# Altium PCB IKIC_PCB.PcbDoc
Units mm, origin at the board's own origin, x right, y up, seen from the top; angles counter-clockwise.
Board outline 145.16 x 127 mm, 2 copper layers (Top Layer, Bottom Layer); 51 components, 37 nets, 180 pads, 30 vias.
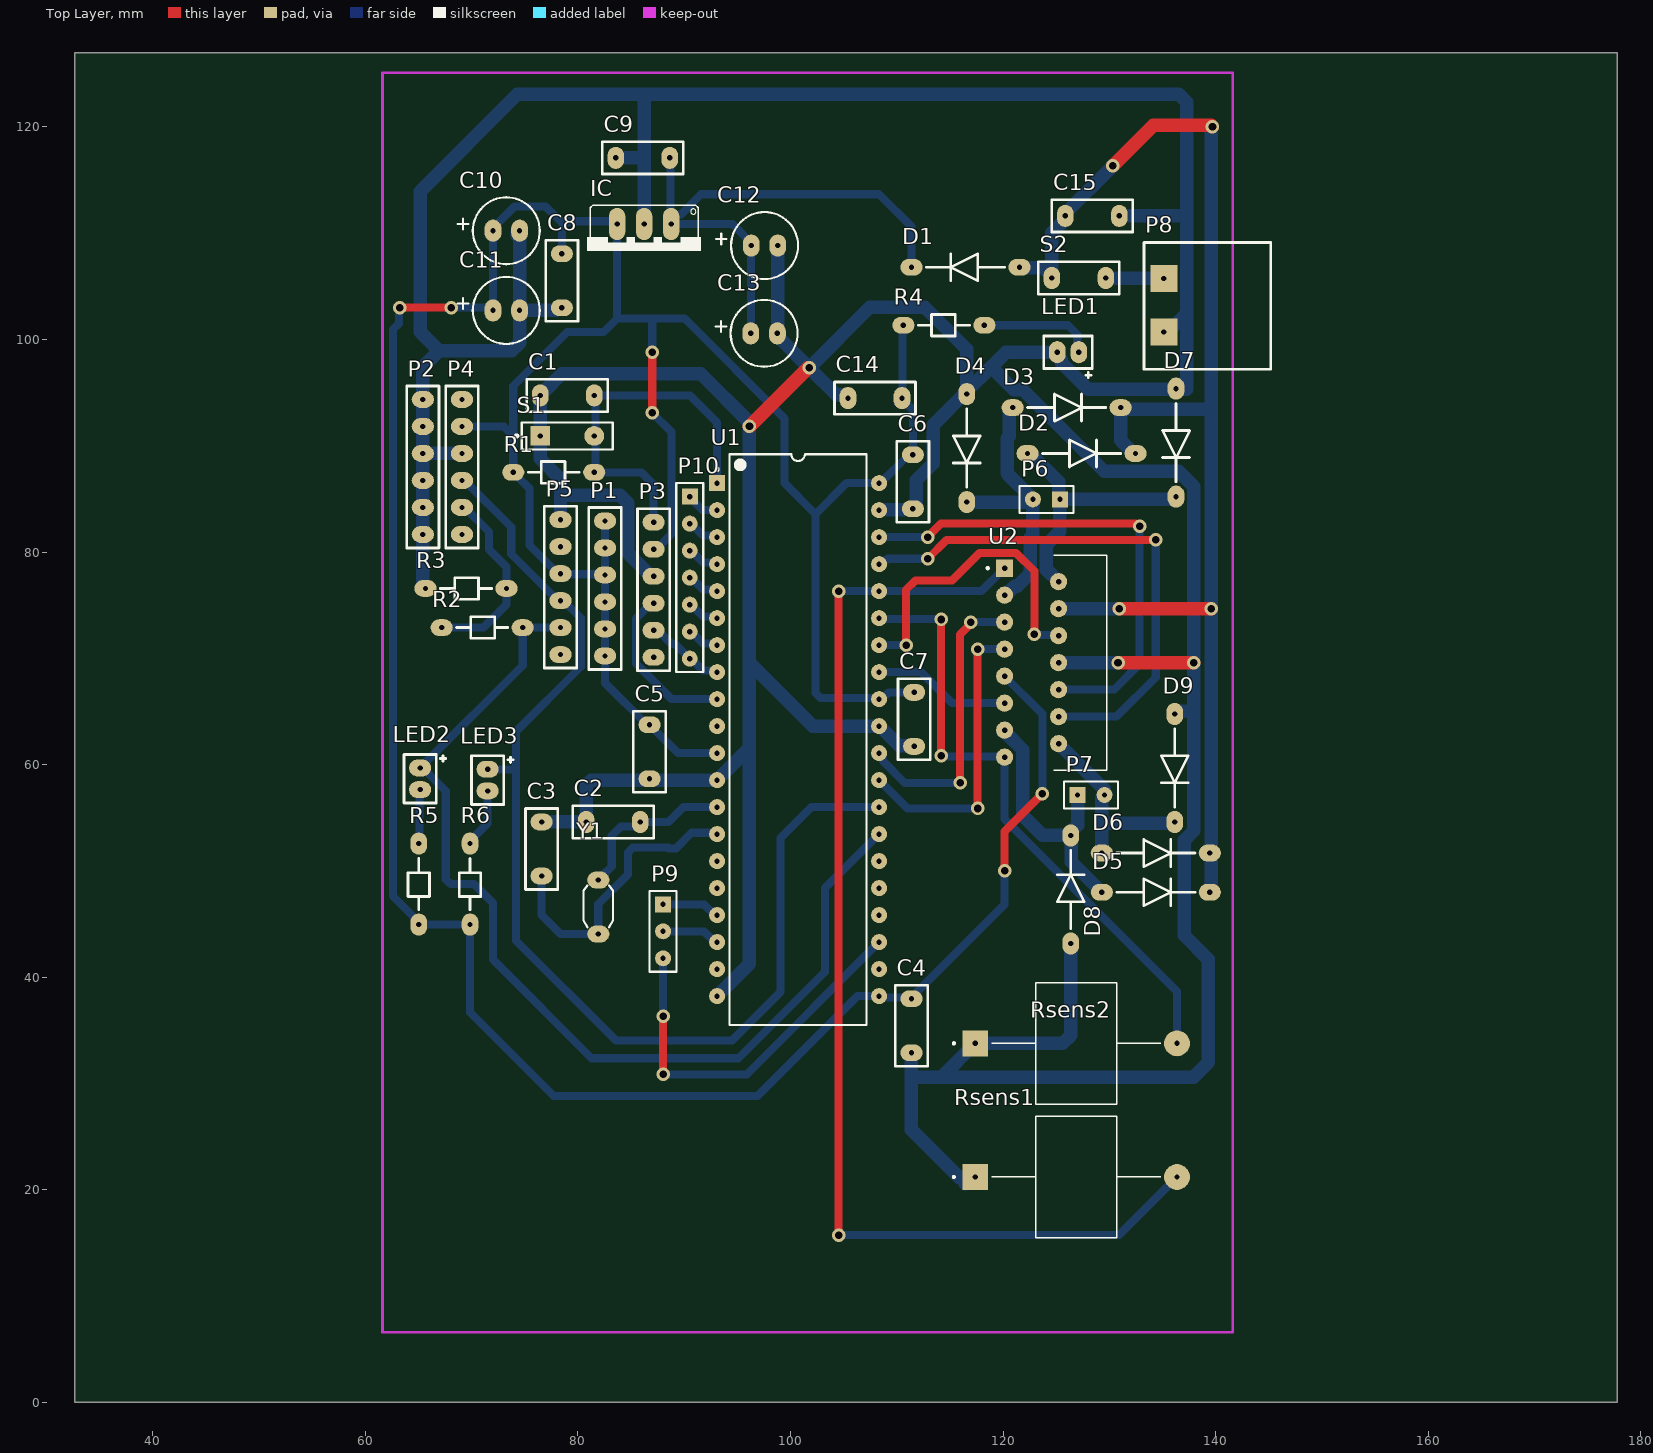
[diagram p0: Top Layer view]
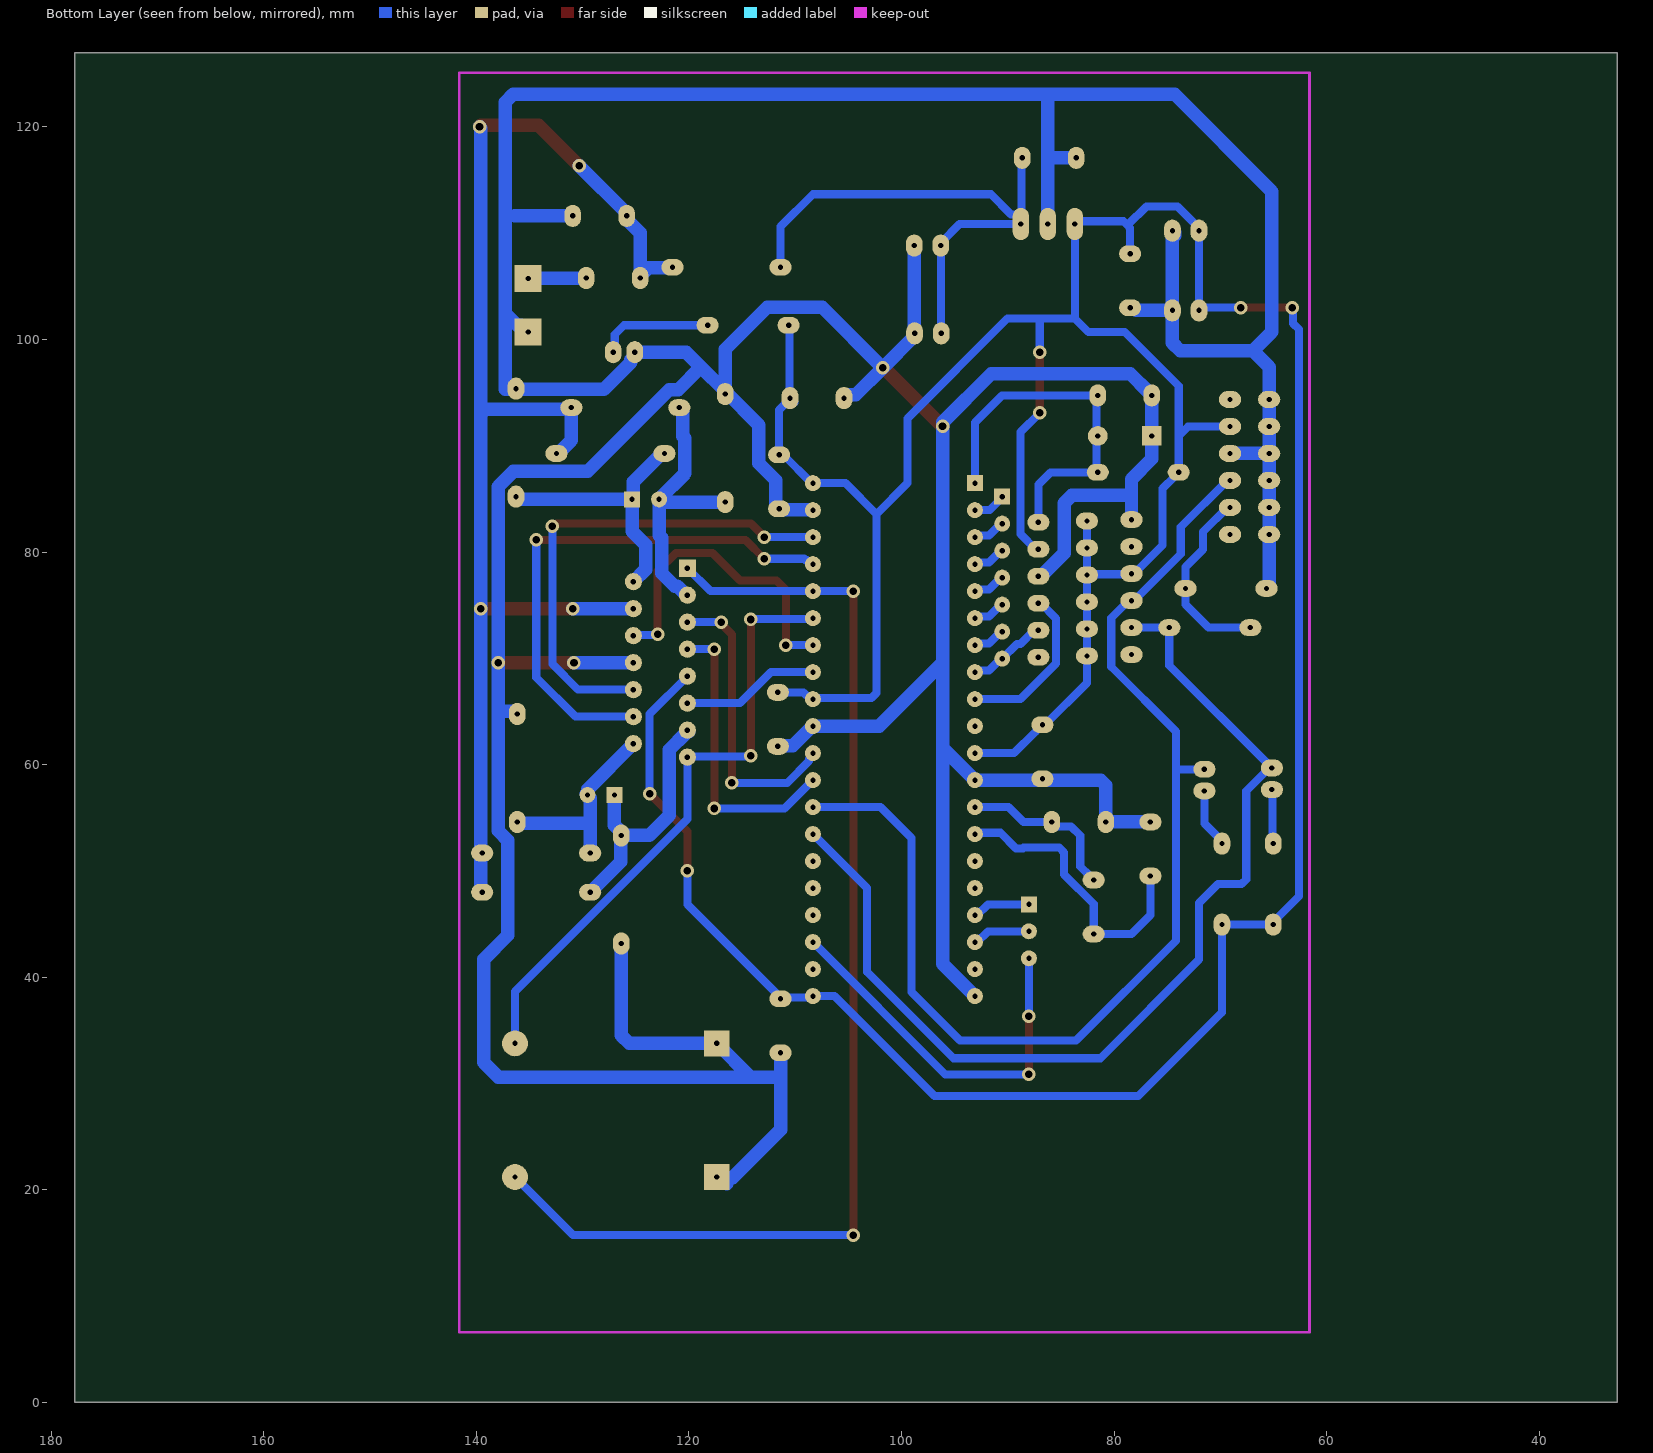
[diagram p1: Bottom Layer view, seen from below]

## Layer stack, top to bottom
Top Solder: solder mask 0.0102, Solder Resist, Dk 3.5
Top Layer: signal copper 0.0356
Dielectric 1: dielectric 0.32, FR-4, Dk 4.8
Bottom Layer: signal copper 0.0356
Bottom Solder: solder mask 0.0102, Solder Resist, Dk 3.5

## Board outline
32.639,0 177.8,0 177.8,127 32.639,127

## Design rules (kind name [scope] priority, off if disabled: settings)
Clearance [All] p1: gap=0.254 ignorepadtopadclearanceinfootprint=FALSE except(0: Arc-Hole Track-Hole SMDPad-Hole THPad-Hole Via-Hole Fill-Hole Poly-Hole Region-Hole Text-Hole)
PolygonConnect [All] p1: connectstyle=Relief reliefconductorwidth=0.254 reliefentries=4 polygonreliefangle="90 Angle" airgapwidth=0.254
RoutingVias [All] p1: holewidth=0.711 width=1.27 viastyle="Through Hole" minholewidth=0.711 minwidth=1.27 maxholewidth=0.711 maxwidth=1.27
SolderMaskExpansion [All] p1: expansion=0.102 istentingtop=FALSE
Width Width_2 [InNetClass('Signal Class')] p1: maxlimit=1 minlimit=0.254 preferedwidth=0.762 minimp=50.000000 maximp=50.000000 favimp=50.000000
Width Width_1 [InNetClass('Power Class')] p2: maxlimit=1.3 minlimit=0.254 preferedwidth=1.27 minimp=50.000000 maximp=50.000000 favimp=50.000000
Width [InNetClass('Signal Class')] p3: maxlimit=1.524 minlimit=0.127 preferedwidth=0.762 minimp=50.000000 maximp=50.000000 favimp=50.000000
30 further rules are at their usual default settings.

## Classes and differential pairs
net class "Signal Class": +5 INT0 INT1 INT2 MCLR NetC9_2 NetLED1_1 NetLED2_1 NetLED3_1 NetP4_5 OSC1 OSC2 PGC PGD PWM1 PWM2 RB0 RB1 RB2 RB3 RB4 RB5 RB9 RB10 RB11 RB12 RF0 RF1 U2RX U2TX
net class "Power Class": GND NetP8_2 OUT1 OUT2 OUT3 OUT4 VCC

## Components (designator, comment, footprint, x,y, rotation, side; value= is the part's Value field where it differs from the comment)
C1 "Cap" CAP200 76.454,94.742 r0 top value=100nF
C2 "Cap" CAP200 80.772,54.61 r0 top value=22pF
C3 "Cap" CAP200 76.581,54.61 r270 top value=22pF
C4 "Cap" CAP200 111.379,32.893 r90 top value=100nF
C5 "Cap" CAP200 86.741,58.674 r90 top value=100nF
C6 "Cap" CAP200 111.506,84.074 r90 top value=100nF
C7 "Cap" CAP200 111.633,61.722 r90 top value=100nF
C8 "Cap" CAP200 78.486,102.997 r90 top value=100nF
C9 "Cap" CAP200 83.566,117.094 r0 top value=100nF
C10 "Cap Pol1" RAD4 72.009,110.236 r0 top value=470uF
C11 "Cap Pol1" RAD4 72.009,102.743 r0 top value=470uF
C12 "Cap Pol1" RAD4 96.306,108.839 r0 top value=470uF
C13 "Cap Pol1" RAD4 96.266,100.584 r0 top value=470uF
C14 "Cap" CAP200 105.41,94.488 r0 top value=100nF
C15 "Cap" CAP200 130.937,111.633 r180 top value=100nF
D1 "Diode 1N4007" DIODE400 116.713,106.807 r0 top
D2 "Diode 1N5402" DIODE400 127.127,89.281 r180 top
D3 "Diode 1N5402" DIODE400 125.73,93.599 r180 top
D4 "Diode 1N5402" DIODE400 116.586,90.043 r90 top
D5 "Diode 1N5402" DIODE400 134.112,48.006 r180 top
D6 "Diode 1N5402" DIODE400 134.112,51.689 r180 top
D7 "Diode 1N5402" DIODE400 136.271,90.551 r90 top
D8 "Diode 1N5402" DIODE400 126.365,48.006 r270 top
D9 "Diode 1N5402" DIODE400 136.144,59.944 r90 top
IC "L7805" 78XXS 86.233,108.331 r180 top
LED1 "GREEN" LED_2 126.111,98.425 r180 top
LED2 "GREEN" LED_2 65.532,58.674 r270 top
LED3 "GREEN" LED_2 71.882,58.547 r270 top
P1 "5V" HEADER_6 82.55,76.581 r180 top
P2 "GND" HEADER_6 65.405,88.011 r0 top
P3 "Programator" HEADER_6 87.122,76.454 r0 top
P4 "Bluetooth" HEADER_6 69.088,88.011 r0 top
P5 "FT232" HEADER_6 78.359,76.708 r180 top
P6 "Motor 1" HDR1X2 125.349,84.963 r180 top
P7 "Motor 2" HDR1X2 127,57.15 r0 top
P8 "2EDGRC-5.08-02P-14-00A(H)" PWR_Con 139.192,103.632 r0 top
P9 "Interrupt" HDR1X3 88.011,46.863 r270 top
P10 "GPIO" HDR1X7 90.524,85.217 r270 top
R1 "Res1" RES400 77.724,87.503 r180 top value=10K
R2 "Res1" RES400 70.993,72.898 r0 top value=4.7K
R3 "Res1" RES400 69.469,76.581 r0 top value=10K
R4 "Res1" RES400 114.427,101.346 r180 top value=1K
R5 "Res1" RES400 65.024,48.768 r270 top value=1K
R6 "Res1" RES400 69.85,48.768 r270 top value=1K
Rsens1 "15W" DIOAD1898W129L762D1143 126.873,21.209 r0 top value=5
Rsens2 "15W" DIOAD1898W129L762D1143 126.873,33.782 r0 top value=5
S1 "SW-PB" SPST-2 78.994,90.932 r0 top
S2 "SW-SPST" CAP200 129.667,105.791 r180 top
U1 "DSPIC30F4013-20I/P" PDIP600-P40 100.711,62.357 r0 top
U2 "L298N" TO127P2020X500X2100-15 120.142,78.486 r0 top
Y1 "XTAL" OSC_5 81.915,46.99 r0 top

## Footprints (in the part's own frame and the unit in brackets; to place one, negate y for a bottom-side part, rotate by r counter-clockwise, add the part's x,y. Pads: shape width x height; smd on the part's side, far side on the other; paste and mask are expansions set on the pad)
78XXS [mil]
  oval 60x120 hole 19.68: GND(0,-100) IN(-100,-100) OUT(100,-100)
  silkscreen extent -210,-170 210,0
CAP200 [mil]
  oval 62x82 hole 19.68: 1(0,0) 2(200,0)
  silkscreen extent -50,-60 250,60
DIOAD1898W129L762D1143 [mm]
  round 2.43 hole 0.5: A(9.49,0)
  rect 2.43x2.43 / inner round 2.43 / far side rect 2.43x2.43 hole 0.5: C(-9.49,0)
  silkscreen extent -11.6,-5.72 7.96,5.72
DIODE400 [mil]
  oval 82x62 hole 19.68: 1(190,0) 2(-210,0)
  silkscreen extent -155,-50 135,50
HDR1X2 [mm] "Connector; Header; 2 Position"
  rect 1.5x1.5 hole 0.5: 1(0,0)
  round 1.5 hole 0.5: 2(2.54,0)
  silkscreen extent -1.27,-1.27 3.81,1.27
HDR1X3 [mm] "Connector; Header; 3 Position"
  rect 1.5x1.5 hole 0.5: 1(0,0)
  round 1.5 hole 0.5: 2(2.54,0) 3(5.08,0)
  silkscreen extent -1.27,-1.27 6.35,1.27
HDR1X7 [mm] "Connector; Header; 7 Position"
  rect 1.5x1.5 hole 0.5: 1(0,0)
  round 1.5 hole 0.5: 2(2.54,0) 3(5.08,0) 4(7.62,0) 5(10.16,0) 6(12.7,0) 7(15.24,0)
  silkscreen extent -1.27,-1.27 16.51,1.27
HEADER_6 [mil]
  oval 82x62 hole 19.68: 1(0,250) 2(0,150) 3(0,50) 4(0,-50) 5(0,-150) 6(0,-250)
  silkscreen extent -60,-300 60,300
LED_2 [mil]
  oval 62x82 hole 19.68: 1(40,-15) 2(-40,-15)
  silkscreen extent -90,-75 90,80, body extent -105,-126 110,106, height 346
OSC_5 [mil]
  oval 82x62 hole 19.68: 1(0,-115) 2(0,85)
  silkscreen extent -55,-90 55,65, body extent -92,-240 92,207, height 138
PDIP600-P40 [mm] "DIP, 40-Leads, Row Spacing 15.24mm, Pitch 2.54mm, Body 51.8x13.5mm"
  rect 1.5x1.5 hole 0.5: 1(-7.62,24.13)
  round 1.5 hole 0.5: 2(-7.62,21.59) 3(-7.62,19.05) 4(-7.62,16.51) 5(-7.62,13.97) 6(-7.62,11.43) 7(-7.62,8.89) 8(-7.62,6.35) 9(-7.62,3.81) 10(-7.62,1.27) 11(-7.62,-1.27) 12(-7.62,-3.81) 13(-7.62,-6.35) 14(-7.62,-8.89) 15(-7.62,-11.43) 16(-7.62,-13.97) 17(-7.62,-16.51) 18(-7.62,-19.05) 19(-7.62,-21.59) 20(-7.62,-24.13) 21(7.62,-24.13) 22(7.62,-21.59) 23(7.62,-19.05) 24(7.62,-16.51) 25(7.62,-13.97) 26(7.62,-11.43) 27(7.62,-8.89) 28(7.62,-6.35) 29(7.62,-3.81) 30(7.62,-1.27) 31(7.62,1.27) 32(7.62,3.81) 33(7.62,6.35) 34(7.62,8.89) 35(7.62,11.43) 36(7.62,13.97) 37(7.62,16.51) 38(7.62,19.05) 39(7.62,21.59) 40(7.62,24.13)
  silkscreen extent -7.74,-26.85 6.45,26.85, body extent -7.3,-26.85 7.3,26.85, height 6.35
PWR_Con [mil]
  rect 100x100 hole 19.68: 1(-160,-115) 2(-160,83)
  silkscreen extent -234,-253 236,217, body extent -239,-256 234,222, height 344
RAD4 [mil]
  oval 62x82 hole 19.68: 1(0,0) 2(98.43,0)
  silkscreen extent -131,-124 173,124
RES400 [mil]
  oval 82x62 hole 19.68: 1(-150,0) 2(150,0)
  silkscreen extent -95,-40 95,40
SPST-2 [mm] "Switch; 2 Leads"
  rect 1.85x1.85 hole 0.5: 1(-2.54,0)
  round 1.85 hole 0.5: 2(2.54,0)
  silkscreen extent -4.89,-1.27 4.28,1.27
TO127P2020X500X2100-15 [mm]
  rect 1.62x1.62 hole 0.5: 1(0,0)
  round 1.62 hole 0.5: 2(5.08,-1.27) 3(0,-2.54) 4(5.08,-3.81) 5(0,-5.08) 6(5.08,-6.35) 7(0,-7.62) 8(5.08,-8.89) 9(0,-10.16) 10(5.08,-11.43) 11(0,-12.7) 12(5.08,-13.97) 13(0,-15.24) 14(5.08,-16.51) 15(0,-17.78)
  silkscreen extent -1.69,-18.99 9.63,1.21

## Part data
C1 C2 C3 C4 C5 C6 C7 C8 C9 C14 C15: "Capacitor", LatestRevisionDate=17-Jul-2002, LatestRevisionNote="Re-released for DXP Platform.", PackageDescription="Radial Cap, Thru-Hole; 2 Leads; 0.3 in Pin Spacing", PackageReference=RAD-0.3, Published=8-Jun-2000, Publisher="Altium Limited"
C10 C11 C12 C13: "Polarized Capacitor (Radial)", LatestRevisionDate=17-Jul-2002, LatestRevisionNote="Re-released for DXP Platform.", PackageDescription="Polarized Capacitor (Radial); 2 Leads", PackageReference=RB7.6-15, Published=8-Jun-2000, Publisher="Altium Limited"
D1: "1 Amp General Purpose Rectifier", Code_JEDEC=DO-204-AL, ComponentLink1Description="Manufacturer Link", ComponentLink1URL=http://www.fairchildsemi.com/, ComponentLink2Description=Datasheet, ComponentLink2URL=http://www.fairchildsemi.com/ds/1N%2F1N4001.pdf, DatasheetVersion=1998, LatestRevisionDate=17-Jul-2002, LatestRevisionNote="Re-released for DXP Platform.", PackageDescription="Diode, Axial; Body 5.2 x 2.7 mm (LxDia. max), Lead Dia. 0.86 mm (max)", PackageReference=DO-41, PackageVersion=Aug-1999, Published=8-Jun-2000, Publisher="Altium Limited"
D2 D3 D4 D5 D6 D7 D8 D9: "3 Amp General Purpose Rectifier", ComponentLink1Description="Manufacturer Link", ComponentLink1URL=http://www.fairchildsemi.com/, ComponentLink2Description=Datasheet, ComponentLink2URL=http://www.fairchildsemi.com/ds/1N%2F1N5400.pdf, DatasheetVersion=1998, LatestRevisionDate=17-Jul-2002, LatestRevisionNote="Re-released for DXP Platform.", PackageDescription="Diode, Axial; Body 9.5 x 5.6 mm (LxDia. max), Lead Dia. 1.32 mm (max)", PackageReference=DO-201AD, PackageVersion=Aug-1999, Published=8-Jun-2000, Publisher="Altium Limited"
IC: "Linear Voltage Regulator IC 1 Output 1.5A D2PAK", Package="TO-263-3 Inchange Semiconductor", Availability=Unavailable, MF=STMicroelectronics, MP=L7805, Price=None, SnapEDA_Link=https://www.snapeda.com/parts/L7805/STMicroelectronics/view-part/563125/?ref=snap
LED1 LED2 LED3: library part LED1, "Typical RED GaAs LED", LatestRevisionDate=08-Jul-2005, LatestRevisionNote="Mech Layer 1 removed.", PackageDescription="LED; 2 Leads", PackageReference=LED-1, Published=8-Jun-2000, Publisher="Altium Limited"
P1 P2 P3 P4 P5: library part "Header 6", "Header, 6-Pin", LatestRevisionDate=17-Jul-2002, LatestRevisionNote="Re-released for DXP Platform.", Publisher="Altium Limited"
P6 P7: library part "Header 2", "Header, 2-Pin", LatestRevisionDate=17-Jul-2002, LatestRevisionNote="Re-released for DXP Platform.", Publisher="Altium Limited"
P8: library part 00000002, "TERM BLOCK HDR 2POS 90DEG 5.08MM", Manufacturer Part Number=2EDGRC-5.08-02P-14-00A(H), Price=0.1304, Suplier=TME, Suplier Product Link=https://www.tme.eu/en/details/2edgrc5.08-2p14/pluggable-terminal-blocks/degson-electronics/2edgrc-508-02p-14-00ah/
P9: library part "Header 3", "Header, 3-Pin", LatestRevisionDate=17-Jul-2002, LatestRevisionNote="Re-released for DXP Platform.", Publisher="Altium Limited"
P10: library part "Header 7", "Header, 7-Pin", LatestRevisionDate=17-Jul-2002, LatestRevisionNote="Re-released for DXP Platform.", Publisher="Altium Limited"
R1 R2 R3 R4 R5 R6: "Resistor", LatestRevisionDate=17-Jul-2002, LatestRevisionNote="Re-released for DXP Platform.", PackageDescription="Axial Device, Thru-Hole; 2 Leads; 0.3 in Pin Spacing", PackageReference=AXIAL-0.3, Published=8-Jun-2000, Publisher="Altium Limited"
Rsens1 Rsens2: library part Res1, "Resistor", LatestRevisionDate=17-Jul-2002, LatestRevisionNote="Re-released for DXP Platform.", PackageDescription="Axial Device, Thru-Hole; 2 Leads;", Published=8-Jun-2000, Publisher="Altium Limited"
S1: "Switch", LatestRevisionDate=17-Jul-2002, LatestRevisionNote="Re-released for DXP Platform.", PackageDescription="Switch; 2 Leads", PackageReference=SPST-2, Published=24-Mar-1999, Publisher="Altium Limited"
S2: "Single-Pole, Single-Throw Switch", LatestRevisionDate=17-Jul-2002, LatestRevisionNote="Re-released for DXP Platform.", PackageDescription="Switch; 2 Leads", PackageReference=SPST-2, Published=24-Mar-1999, Publisher="Altium Limited"
U1: "High-Performance 16-bit Digital Signal Controller, 48 KB Flash, 2 KB SRAM, 1 KB EEPROM, 40-Pin PDIP, Industrial Temperature", Supplier Part Number 1=DSPIC30F4013-20IP-ND, ComponentLink1Description=Datasheet, ComponentLink1URL=http://ww1.microchip.com/downloads/en/DeviceDoc/70138F.pdf, ComponentLink2Description="Packaging Specification", ComponentLink2URL=http://www.microchip.com/stellent/groups/techpub_sg/documents/packagingspec/en012702.pdf, ComponentLink3Description="Microchip.com Home", ComponentLink3URL=http://www.microchip.com/, DatasheetVersion="revF, Apr-2008", PackageDescription="40-Lead Plastic Dual In-Line (P) - 600 mil Body [PDIP]", PackageReference=PDIP600-P40, PackageVersion="revBB, Aug-2009", Published=29-Jan-2009, Publisher="Altium Limited", Supplier 1=Digi-Key, Supplier 2=Farnell, Supplier Part Number 2=1439755
U2: "Dual Full Bridge Motor Driver 15-Pin(15+Tab) MULTIWATT V Tube", Package=None, Availability=Unavailable, MP=L298N, Price=None
Y1: "Crystal Oscillator", LatestRevisionDate=17-Jul-2002, LatestRevisionNote="Re-released for DXP Platform.", PackageDescription="Crystal, Thru-Hole; 2 Leads; Body 3.1 x 8.2 mm (Dia.xH)", PackageReference=R38, Published=8-Jun-2000, Publisher="Altium Limited"

## Via types
v1: diameter 1.27, hole 0.711, Top Layer to Bottom Layer, 30 vias

## Nets (pads, with @x,y where several pads share a name; then routed paths per layer and width w, separated by ;. In a path a pad name is that pad's centre, name@x,y a point inside that pad or via, vN(x,y) a via of type N, cw(c..) or ccw(c..) an arc to the next point about the centre after c; other vN are vias at no path point)
+5: C4.2 C5.2 C6.2 C7.2 C8.2 C10.1 C11.1 C14.2 IC.OUT P1.1 P1.2 P1.3 P1.4 P1.5 P1.6 P3.2 P4.2 P5.4 R1.2 R4.2 R5.2 R6.2 U1.11 U1.21 U1.32 U1.40 U2.9 | length 374.3
  Top Layer w0.762: v1(63.246,102.997) v1(68.072,102.997) ; v1(86.995,93.091) v1(86.995,98.806) ; v1(120.142,50.038) 120.142,53.721 v1(123.698,57.277)
  Bottom Layer w0.762: v1(63.246,102.997) 63.149,102.9 63.149,101.503 62.611,100.965 62.611,47.625 65.024,45.212 R5.2 R6.2 69.85,36.703 77.721,28.832 ; v1(68.072,102.997) 71.755,102.997 C11.1 C10.1 72.009,110.49 74.041,112.522 76.962,112.522 78.676,110.807 78.803,110.807 ; P4.2 73.025,91.821 73.914,90.932 ; 77.724,28.829 96.901,28.829 106.299,38.227 U1.21 ; C8.2 78.486,110.49 78.803,110.807 ; P1.6 P1.5 P1.4 ; v1(86.995,93.091) 88.798,91.288 88.798,81.686 87.376,80.264 P3.2 ; v1(86.995,98.806) 86.995,101.981 ; U1.11 89.408,61.087 87.401,63.094 87.401,63.128 86.775,63.754 C5.2 86.487,63.754 82.55,67.691 P1.1 P1.2 P1.3 P1.4 ; U1.21@108.458,38.1 111.252,38.1 C4.2@111.316,38.036 ; C14.2@110.08,94.078 C14.2@110.115,94.078 ; C14.2@110.49,94.014 C14.2 ; R4.2 110.553,101.282 110.553,94.551 C14.2 ; C4.2 C4.2@111.316,38.036 ; C7.2 109.22,66.802 108.585,66.167 U1.32 108.216,66.282 102.808,66.282 102.362,66.728 102.362,83.566 ; v1(120.142,50.038) 120.142,46.863 111.789,38.51 111.789,38.348 111.477,38.036 C4.2@111.316,38.036 ; U2.9 123.698,64.77 v1(123.698,57.277) ; 73.914,90.932 73.914,95.631 78.994,100.711 82.423,100.711 83.693,101.981 ; 73.914,90.932 R1.2 73.948,87.503 74.324,87.128 74.324,87.093 75.438,85.979 75.438,80.645 78.105,77.978 P5.4 78.422,77.915 82.486,77.915 P1.4 ; 78.803,110.807 79.121,111.125 83.439,111.125 IC.OUT 83.693,101.981 ; 83.693,101.981 86.995,101.981 ; 86.995,101.981 90.043,101.981 99.441,92.583 99.441,86.487 102.362,83.566 ; 102.362,83.566 105.283,86.487 U1.40 108.458,86.487 111.125,89.154 C6.2 111.506,93.381 110.49,94.397 C14.2
GND: C1.1 C2.1 C3.1 C4.1 C5.1 C6.1 C7.1 C8.1 C9.1 C10.2 C11.2 C12.2 C13.2 C14.1 C15.1 D4.1 D7.1 D8.1 D9.1 IC.GND LED1.1 P2.1 P2.2 P2.3 P2.4 P2.5 P2.6 P3.3 P4.3 P5.6 P8.1 R3.1 Rsens1.C Rsens2.C S1.1 U1.12 U1.20 U1.31 U1.39 U2.8 | length 587.3
  Top Layer w1.27: v1(96.139,91.821) 101.644,97.326 v1(101.771,97.326) ; v1(130.81,69.596) v1(137.922,69.596)
  Bottom Layer w1.27: R3.1 65.546,76.581 65.405,76.722 P2.6 P2.5 P2.4 P2.3 ; P4.3 P2.3 ; C10.2@74.295,110.109 74.295,109.773 74.509,109.559 C11.2 ; C3.1 C2.1 80.772,58.068 81.251,58.547 U1.12 96.139,61.595 ; P5.6 78.359,85.344 ; C8.1 78.15,102.997 77.896,102.743 C11.2 ; C9.1 86.106,117.094 86.233,117.221 ; IC.GND@86.233,110.109 IC.GND 86.233,117.221 ; P3.3 86.868,77.724 84.709,79.883 84.709,84.6 83.965,85.344 78.359,85.344 ; U1.20 96.139,41.275 96.139,61.595 ; C13.2 C13.2@98.786,100.604 ; C12.2 98.786,108.819 C13.2@98.786,100.604 ; C14.1 105.41,94.66 105.269,94.8 104.296,94.8 v1(101.771,97.326) ; U1.39 108.375,83.991 C6.1@110.96,83.991 ; C4.1 111.379,30.607 ; C6.1 111.678,84.074 111.818,84.215 111.818,86.755 113.436,88.373 113.436,90.148 113.411,90.173 113.411,91.948 D4.1@116.586,95.123 ; C7.1 111.575,61.78 110.239,61.78 108.392,63.627 U1.31 102.108,63.627 96.139,69.596 ; Rsens1.C@116.441,20.592 116.441,20.881 116.168,21.154 115.879,21.154 111.379,25.654 111.379,30.607 ; D4.1 D4.1@116.586,95.123 ; LED1.1@125.095,98.638 LED1.1@125.095,98.665 ; LED1.1 LED1.1@125.095,98.665 ; U2.8 v1(130.81,69.596) ; LED1.1@125.451,98.114 125.451,97.858 128.004,95.304 137.269,95.304 137.269,102.453 ; D8.1 126.365,34.526 125.621,33.782 117.534,33.782 117.383,33.631 Rsens2.C 114.208,30.607 ; C15.1 136.398,111.633 ; P8.1@135.763,101.346 136.162,101.346 137.269,102.453 ; D9.1 136.144,64.883 136.285,65.024 137.947,65.024 ; P2.3 P2.2 P2.1 65.405,97.409 66.929,98.933 ; 66.929,98.933 73.765,98.933 74.509,99.677 C11.2 ; 66.929,98.933 65.151,100.711 65.151,113.919 74.295,123.063 86.596,123.063 ; 78.359,85.344 78.359,86.868 76.454,88.773 S1.1 C1.1 76.454,94.914 76.595,95.054 76.766,95.054 78.486,96.774 91.567,96.774 96.139,92.202 v1(96.139,91.821) 96.139,69.596 ; 86.233,117.221 86.233,122.7 86.596,123.063 ; 86.596,123.063 136.543,123.063 137.287,122.319 137.287,102.471 137.269,102.453 ; 96.139,61.595 96.139,69.596 ; C13.2@98.786,100.604 98.786,100.31 v1(101.771,97.326) ; v1(101.771,97.326) 107.467,103.022 112.642,103.022 116.586,99.078 D4.1@116.586,95.123 ; 111.379,30.607 114.208,30.607 ; 114.208,30.607 137.922,30.607 139.301,31.986 139.301,41.674 137.033,43.942 137.033,52.874 137.947,53.789 137.947,65.024 ; D4.1@116.586,95.123 118.872,97.409 ; 118.872,97.409 120.269,98.806 124.954,98.806 LED1.1@125.095,98.665 ; 118.872,97.409 121.006,95.275 121.852,95.275 129.523,87.605 136.508,87.605 137.947,86.165 137.947,65.024
INT0: P9.1 U1.17 | length 5.5
  Bottom Layer w0.762: P9.1 91.875,46.863 92.891,45.847 U1.17
INT1: P9.3 U1.23 | length 36.4
  Top Layer w0.762: v1(88.011,30.861) v1(88.011,36.322)
  Bottom Layer w0.762: v1(88.011,30.861) 95.885,30.861 U1.23 ; v1(88.011,36.322) P9.3
INT2: P9.2 U1.18 | length 5.5
  Bottom Layer w0.762: P9.2 91.875,44.323 92.891,43.307 U1.18
MCLR: C1.2 P3.1 R1.1 S1.2 U1.1 | length 35.4
  Bottom Layer w0.762: R1.1@81.5,87.503 R1.1 R1.1@81.788,87.503 ; S1.2@81.597,90.487 S1.2@81.661,90.424 ; P3.1 87.122,86.36 85.979,87.503 R1.1@81.788,87.503 ; U1.1 93.091,92.202 90.551,94.742 C1.2 81.661,94.615 S1.2@81.661,90.424 ; S1.2@81.661,90.424 81.661,87.63 R1.1@81.788,87.503
NetC9_2: C9.2 C12.1 C13.1 D1.2 IC.IN | length 52.2
  Bottom Layer w0.762: C9.2 88.709,117.03 88.709,111.427 88.709,110.934 IC.IN ; C13.1 96.286,100.604 96.286,108.819 C12.1 96.306,109.093 94.528,110.871 IC.IN ; D1.2 111.379,110.617 108.331,113.665 91.567,113.665 89.681,111.779 89.125,111.779 88.773,111.427 IC.IN
NetLED1_1: LED1.2 R4.1 | length 10.8
  Bottom Layer w0.762: R4.1 126.111,101.346 126.971,100.486 126.971,98.962 LED1.2
NetLED2_1: LED2.1 R5.1 | length 5.1
  Bottom Layer w0.762: R5.1 65.087,52.642 65.087,57.594 LED2.1
NetLED3_1: LED3.1 R6.1 | length 5.7
  Bottom Layer w0.762: R6.1@69.913,52.642 R6.1 69.85,52.832 71.501,54.483 LED3.1
NetP4_5: P4.5 R2.1 R3.2 | length 18
  Bottom Layer w0.762: R2.1 71.12,72.898 73.279,75.057 R3.2 73.279,78.61 71.628,80.261 71.628,81.915 69.342,84.201 P4.5
NetP8_2: P8.2 S2.1 | length 5.5
  Bottom Layer w1.27: S2.1 129.692,105.766 135.103,105.766 P8.2
OSC1: C2.2 U1.13 Y1.2 | length 15.2
  Bottom Layer w0.762: Y1.2 81.949,49.149 82.325,49.524 82.325,49.559 83.185,50.419 83.185,53.34 84.045,54.2 C2.2@85.477,54.2 ; C2.2 88.519,54.61 89.916,56.007 U1.13
OSC2: C3.2 U1.14 Y1.1 | length 27.8
  Bottom Layer w0.762: C3.2 76.581,45.847 78.359,44.069 Y1.1 81.915,46.883 84.709,49.677 84.709,51.751 85.155,52.197 88.519,52.197 88.584,52.132 89.216,52.132 90.678,53.594 92.964,53.594 U1.14
OUT1: D2.1 D7.2 P6.1 U2.2 | length 25.6
  Bottom Layer w1.27: D2.1 122.555,89.281 125.234,86.602 125.234,85.078 P6.1 ; U2.2 124.079,78.359 124.079,80.703 125.349,81.973 P6.1 ; D7.2 136.271,85.104 136.13,84.963 P6.1
OUT2: D3.1 D4.2 P6.2 U2.3 | length 26.6
  Bottom Layer w1.27: D4.2 122.493,84.709 122.747,84.963 P6.2 ; U2.3 120.237,75.946 121.078,76.787 121.32,76.787 122.555,78.022 122.555,81.334 122.809,81.588 P6.2 ; D3.1 120.732,93.599 120.592,93.458 120.592,90.918 120.371,90.697 120.371,87.401 P6.2
OUT3: D5.1 D8.2 P7.1 U2.13 | length 24.9
  Bottom Layer w1.27: U2.13@120.015,63.119 U2.13 120.142,63.151 120.317,62.976 120.317,62.934 121.841,61.41 121.841,55.227 123.728,53.34 D8.2 ; 127,54.311 126.365,53.676 D8.2 ; 127,54.483 P7.1 ; D5.1@129.54,48.006 D5.1 126.423,50.869 126.423,53.282 D8.2
OUT4: D6.1 D9.2 P7.2 U2.14 | length 19.8
  Bottom Layer w0.762: D6.1@128.876,52.064 129.252,51.689 D6.1
  Bottom Layer w1.27: U2.14 129.496,57.702 129.496,57.194 P7.2 ; D6.1 129.286,54.483 ; P7.2@129.667,57.277 P7.2 ; D9.2 136.017,54.483 129.286,54.483 ; 129.286,54.483 129.286,56.834 129.54,57.088 P7.2
PGC: P3.5 P10.7 U1.8 | length 7.8
  Bottom Layer w0.762: P3.5 87.525,72.644 88.815,71.353 89.148,71.353 P10.7 90.624,69.977 91.752,68.848 92.95,68.848 U1.8 U1.8@92.891,68.707
PGD: P3.4 U1.9 | length 15.5
  Bottom Layer w0.762: P3.4 86.868,75.184 85.446,73.762 85.446,69.515 88.793,66.167 U1.9
PWM1: U1.34 U2.6 | length 30.4
  Top Layer w0.762: v1(110.871,71.247) 110.871,76.454 111.76,77.343 115.194,77.343 117.782,79.931 121.215,79.931 122.936,78.21 v1(122.936,72.263) v1@122.936,72.136
  Bottom Layer w0.762: U1.34 v1(110.871,71.247) ; v1(122.936,72.263) 122.999,72.2 125.158,72.2 U2.6
PWM2: U1.33 U2.11 | length 13
  Bottom Layer w0.762: U1.33 112.268,68.707 115.189,65.786 U2.11
RB0: P10.1 U1.2 | length 3.4
  Bottom Layer w0.762: P10.1@90.424,85.217 91.694,83.947 U1.2 U1.2@92.964,83.82
RB1: P10.2 U1.3 | length 3.2
  Bottom Layer w0.762: P10.2@90.424,82.677 90.624,82.677 91.752,81.548 92.95,81.548 U1.3
RB2: P10.3 U1.4 | length 3.4
  Bottom Layer w0.762: P10.3@90.424,80.137 90.624,80.137 91.752,79.008 92.95,79.008 U1.4 U1.4@92.891,78.867
RB3: P10.4 U1.5 | length 3.4
  Bottom Layer w0.762: P10.4@90.424,77.597 90.624,77.597 91.752,76.468 92.95,76.468 U1.5 U1.5@92.891,76.327
RB4: P10.5 U1.6 | length 3.4
  Bottom Layer w0.762: P10.5@90.424,75.057 90.624,75.057 91.752,73.928 92.95,73.928 U1.6 U1.6@92.891,73.787
RB5: P10.6 U1.7 | length 3.4
  Bottom Layer w0.762: P10.6@90.424,72.517 90.624,72.517 91.752,71.388 92.95,71.388 U1.7 U1.7@92.891,71.247
RB9: U1.38 U2.10 | length 46.7
  Top Layer w0.762: v1(112.903,81.407) 114.173,82.677 132.451,82.677 132.705,82.423 v1(132.842,82.423)
  Bottom Layer w0.762: U1.38 v1(112.903,81.407) ; U2.10 130.429,67.056 132.842,69.469 v1(132.842,82.423)
RB10: U1.37 U2.12 | length 50.6
  Top Layer w0.762: v1(112.909,79.375) 114.687,81.153 v1(134.366,81.153)
  Bottom Layer w0.762: U1.37 108.531,78.867 108.9,79.236 109.007,79.236 109.146,79.375 v1(112.909,79.375) ; U2.12 130.683,64.516 134.366,68.199 v1(134.366,81.153)
RB11: Rsens1.A U1.36 U2.1 | length 111.2
  Top Layer w0.762: v1(104.521,15.748) v1(104.521,76.327)
  Bottom Layer w0.762: v1(104.521,15.748) 130.902,15.748 Rsens1.A ; v1(104.521,76.327) U1.36 117.983,76.327 U2.1
RB12: Rsens2.A U1.35 U2.15 | length 58.4
  Top Layer w0.762: v1(114.173,60.858) v1(114.173,73.66)
  Bottom Layer w0.762: U1.35 108.394,73.724 114.109,73.724 v1(114.173,73.66) ; v1(114.173,60.858) 114.249,60.782 120.066,60.782 U2.15 120.142,54.884 136.363,38.663 Rsens2.A
RF0: U1.30 U2.5 | length 27.7
  Top Layer w0.762: v1(115.951,58.293) 115.951,72.253 116.967,73.269 v1(116.967,73.406)
  Bottom Layer w0.762: U1.30 108.331,60.887 108.7,60.518 108.7,60.337 110.744,58.293 v1(115.951,58.293) ; v1(116.967,73.406) U2.5
RF1: U1.29 U2.7 | length 27.9
  Top Layer w0.762: v1(117.602,55.88) v1(117.602,70.866)
  Bottom Layer w0.762: U1.29 110.998,55.88 v1(117.602,55.88) ; v1(117.602,70.866) U2.7
U2RX: LED3.2 P4.4 P5.3 U1.28 | length 109.3
  Bottom Layer w0.762: P4.4 69.342,86.741 73.724,82.359 73.724,79.819 78.105,75.438 P5.3 78.613,75.438 80.264,73.787 80.264,69.215 74.168,63.119 74.168,59.436 ; LED3.2 74.041,59.563 74.168,59.436 ; U1.28 101.981,56.007 99.06,53.086 99.06,38.608 94.488,34.036 83.566,34.036 74.168,43.434 74.168,59.436
U2TX: LED2.2 P5.2 R2.2 U1.27 | length 96
  Bottom Layer w0.762: LED2.2 65.405,59.69 67.564,57.531 67.564,49.214 68.01,48.768 70.231,48.768 72.009,46.99 72.009,41.656 81.28,32.385 95.123,32.385 103.251,40.513 103.251,48.387 U1.27 ; LED2.2@65.561,60.065 65.561,60.1 74.803,69.342 R2.2 P5.2
VCC: C15.2 D1.1 D2.2 D3.2 D5.2 D6.2 S2.2 U2.4 | length 127.5
  Top Layer w1.27: v1(130.302,116.332) 134.112,120.142 139.573,120.142 v1(139.7,120.015) ; v1(130.937,74.676) v1(139.573,74.676)
  Bottom Layer w1.27: D1.1 121.597,106.749 123.801,106.749 S2.2@124.587,105.963 ; S2.2 S2.2@124.587,105.963 ; U2.4 v1(130.937,74.676) ; v1(130.302,116.332) 125.857,111.887 C15.2 125.857,111.297 124.587,110.027 S2.2@124.587,105.963 ; D3.2 131.064,90.506 132.289,89.281 D2.2 ; D3.2@131.106,93.472 131.132,93.447 139.09,93.447 139.573,92.964 ; D5.2 139.573,48.133 v1(139.573,74.676) 139.573,92.964 ; v1(139.7,120.015) 139.573,119.888 139.573,92.964
pads on no net: P3.6 P4.1 P4.6 P5.1 P5.5 U1.10 U1.15 U1.16 U1.19 U1.22 U1.24 U1.25 U1.26

## Keep-outs
Keep-Out Layer:
  lines w0.254: 61.595,6.604 141.595,6.604 141.604,6.613 141.604,125.095 61.604,125.095 61.604,6.675

## Text inside footprints (layer, text, board x,y; h text height)
IC: Mechanical 13 "O" at 84.327,112.144 h1.27 r180; Mechanical 13 "I" at 89.412,112.146 h1.27 r180; Mechanical 13 "-" at 86.868,112.143 h1.27 r180